# Altium PCB fill.PcbDoc
Units mm, origin at the board's own origin, x right, y up, seen from the top; angles counter-clockwise.
Board outline 97.5 x 65 mm, 2 copper layers (Top Layer, Bottom Layer); 19 components, 54 nets, 267 pads, 80 vias.
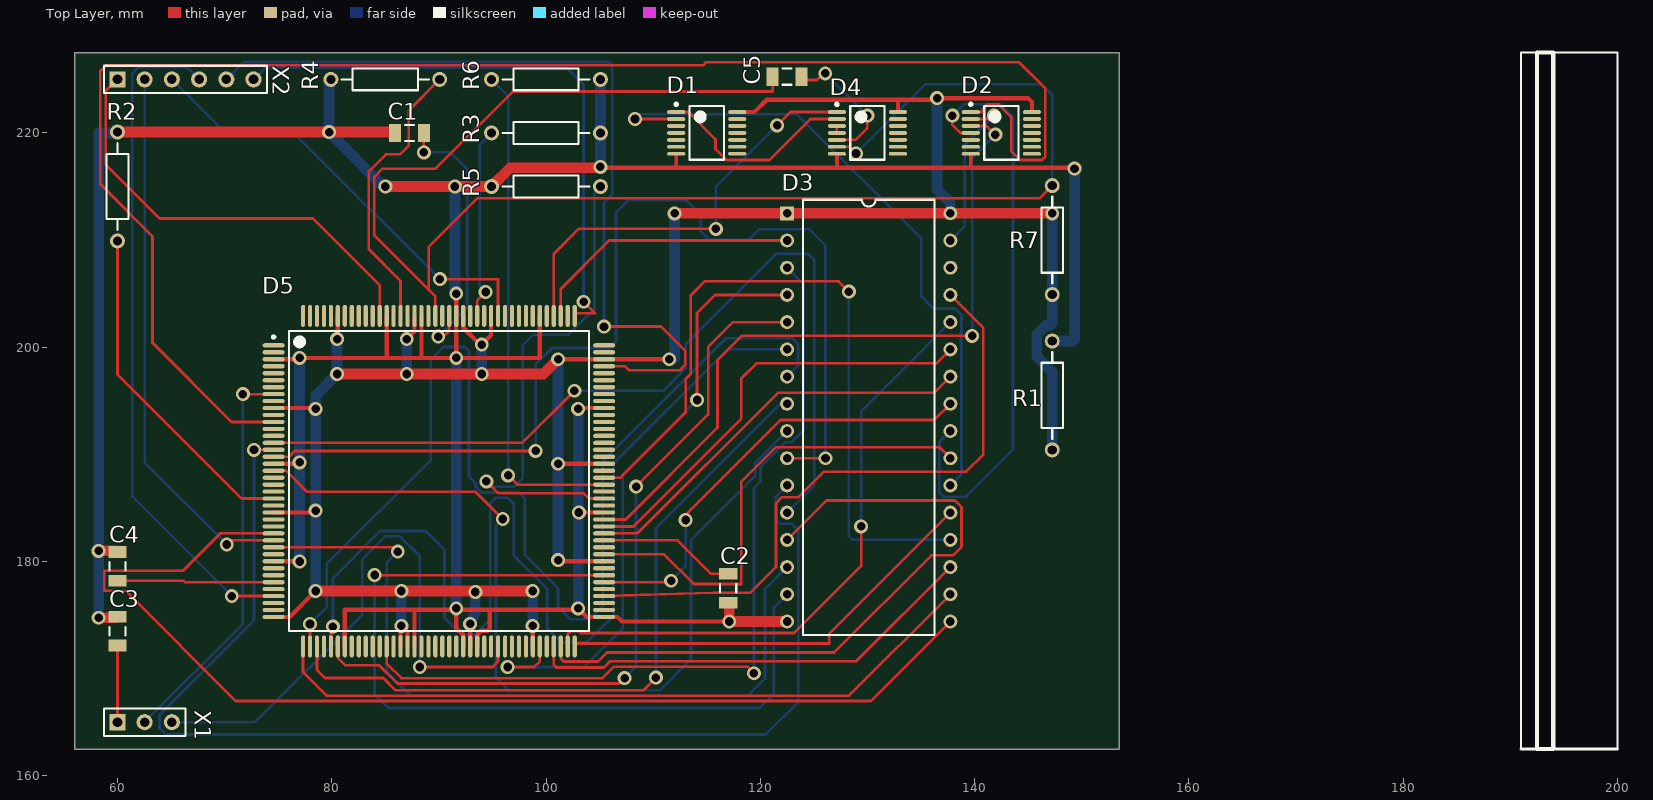
[diagram p0: Top Layer view]
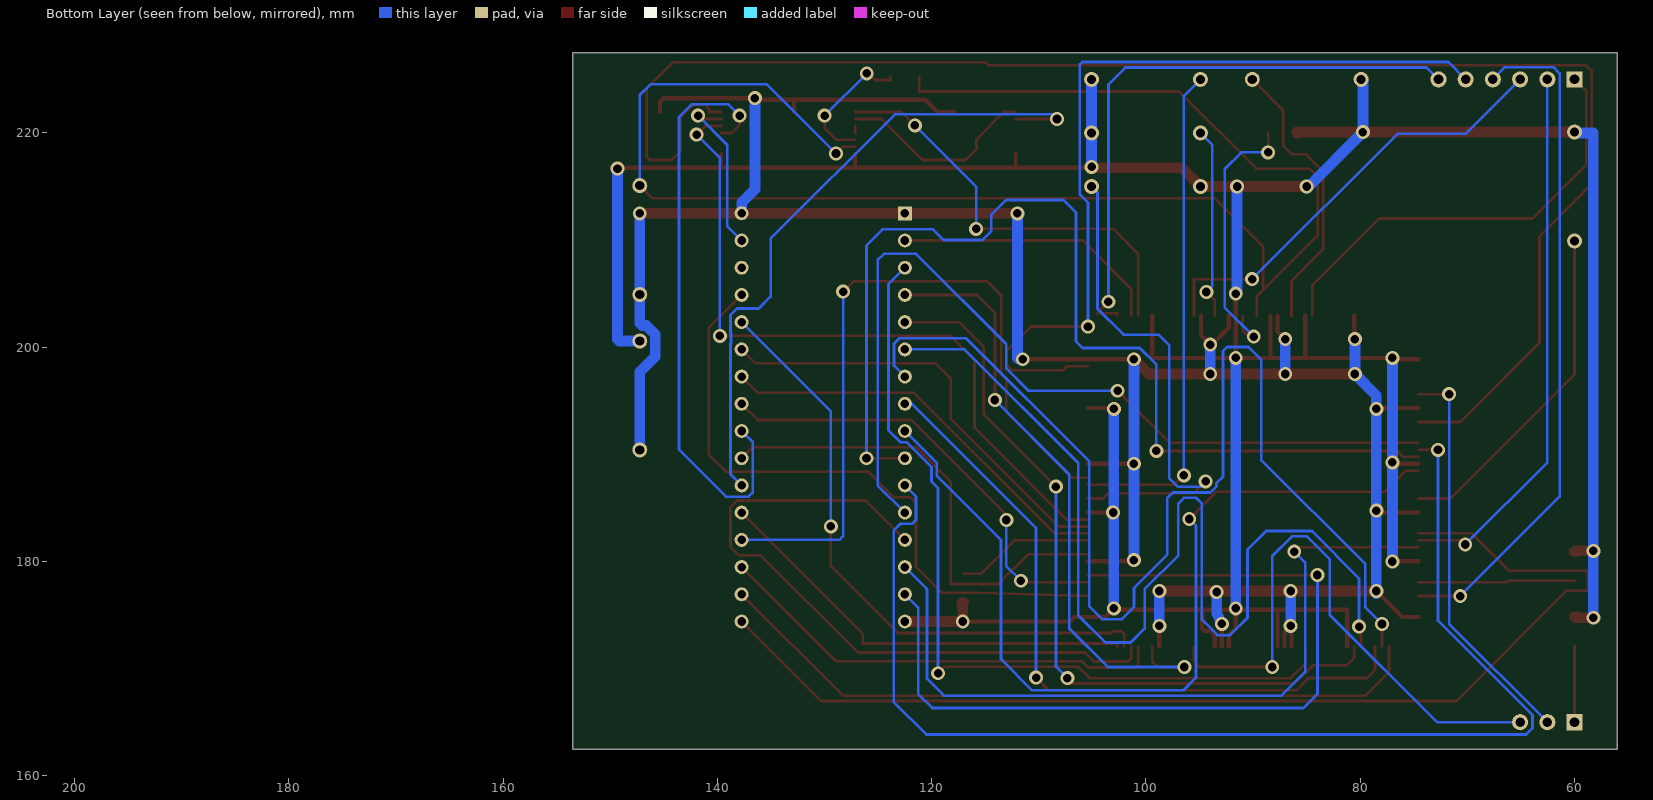
[diagram p1: Bottom Layer view, seen from below]

## Layer stack, top to bottom
Top Layer: signal copper 0.0356
Dielectric: dielectric 0.32, FR-4, Dk 4.8
Bottom Layer: signal copper 0.0356

## Board outline
56,227.5 153.5,227.5 153.5,162.5 56,162.5

## Design rules (kind name [scope] priority, off if disabled: settings)
AssemblyTestPointUsage [All] p0: scope1count=1 scope1_0_kind=Board scope1_0_value=Board scope2count=1 scope2_0_kind=Board scope2_0_value=Board commentlength=0
AssemblyTestpoint [All] p0: scope1count=1 scope1_0_kind=Board scope1_0_value=Board scope2count=1 scope2_0_kind=Board scope2_0_value=Board commentlength=0
Clearance [All] p0: scope1count=1 scope1_0_kind=Board scope1_0_value=Board scope2count=1 scope2_0_kind=Board scope2_0_value=Board commentlength=0 gap=0.25
Clearance [All] p1: gap=0.25
ComponentClearance [All] p0: scope1count=1 scope1_0_kind=Board scope1_0_value=Board scope2count=1 scope2_0_kind=Board scope2_0_value=Board commentlength=0 gap=1 collisioncheckmode=3
ComponentClearance [All] p1: gap=1 collisioncheckmode=3 verticalgap=2540 showdistances=FALSE
DiffPairsRouting [All] p0: scope1count=1 scope1_0_kind=Board scope1_0_value=Board scope2count=1 scope2_0_kind=Board scope2_0_value=Board commentlength=0
FabricationTestPointUsage TestPointUsage [All] p0: scope1count=1 scope1_0_kind=Board scope1_0_value=Board scope2count=1 scope2_0_kind=Board scope2_0_value=Board commentlength=0 valid=0 allowmultiple=FALSE
FabricationTestPointUsage TestPointUsage [All] p1: valid=0 allowmultiple=FALSE
FabricationTestpoint Testpoint [All] p0: scope1count=1 scope1_0_kind=Board scope1_0_value=Board scope2count=1 scope2_0_kind=Board scope2_0_value=Board commentlength=0 side=3 testpointundercomponent=TRUE minsize=1.016 maxsize=2.54 preferedsize=1.524 minholesize=0 maxholesize=1.016 preferedholesize=0.813 testpointgrid=0.025
FabricationTestpoint Testpoint [All] p1: side=3 testpointundercomponent=TRUE minsize=1.016 maxsize=2.54 preferedsize=1.524 minholesize=0 maxholesize=1.016 preferedholesize=0.813 testpointgrid=0.025 allowsidetop=TRUE allowsidebottom=TRUE usegrid=TRUE gridtolerance=0
FanoutControl Fanout_Default [All] p0: scope1count=1 scope1_0_kind=Board scope1_0_value=Board scope2count=1 scope2_0_kind=Board scope2_0_value=Board commentlength=30 // Fanout_Default (Default Rule)
FanoutControl Fanout_Small [All] p0 off: scope1count=1 scope1_0_kind=Board scope1_0_value=Board scope2count=1 scope2_0_kind=Board scope2_0_value=Board commentlength=84 // Protel DXP Scope 1 Expression Was: (CompPinCount < 5)   Fanout_Small (Default Rule)
FanoutControl Fanout_SOIC [All] p0 off: scope1count=1 scope1_0_kind=Board scope1_0_value=Board scope2count=1 scope2_0_kind=Board scope2_0_value=Board commentlength=71 // Protel DXP Scope 1 Expression Was: IsSOIC   Fanout_SOIC (Default Rule)
FanoutControl Fanout_LCC [All] p0 off: scope1count=1 scope1_0_kind=Board scope1_0_value=Board scope2count=1 scope2_0_kind=Board scope2_0_value=Board commentlength=69 // Protel DXP Scope 1 Expression Was: IsLCC   Fanout_LCC (Default Rule)
FanoutControl Fanout_BGA [All] p0 off: scope1count=1 scope1_0_kind=Board scope1_0_value=Board scope2count=1 scope2_0_kind=Board scope2_0_value=Board commentlength=69 // Protel DXP Scope 1 Expression Was: IsBGA   Fanout_BGA (Default Rule)
Height [All] p0: scope1count=1 scope1_0_kind=Board scope1_0_value=Board scope2count=1 scope2_0_kind=Board scope2_0_value=Board commentlength=0
HoleSize [All] p0: scope1count=1 scope1_0_kind=Board scope1_0_value=Board scope2count=1 scope2_0_kind=Board scope2_0_value=Board commentlength=0 absolutevalues=TRUE maxlimit=2.54 minlimit=0.025 maxpercent=80.000 minpercent=20.000
HoleToHoleClearance [All] p0: scope1count=1 scope1_0_kind=Board scope1_0_value=Board scope2count=1 scope2_0_kind=Board scope2_0_value=Board commentlength=0
LayerPairs [All] p0: scope1count=1 scope1_0_kind=Board scope1_0_value=Board scope2count=1 scope2_0_kind=Board scope2_0_value=Board commentlength=0 enforce=TRUE
MinimumSolderMaskSliver [All] p0: scope1count=1 scope1_0_kind=Board scope1_0_value=Board scope2count=1 scope2_0_kind=Board scope2_0_value=Board commentlength=0
MinimumSolderMaskSliver [All] p1: minsoldermaskwidth=0.04
NetAntennae [All] p0: scope1count=1 scope1_0_kind=Board scope1_0_value=Board scope2count=1 scope2_0_kind=Board scope2_0_value=Board commentlength=0
PasteMaskExpansion [All] p0: scope1count=1 scope1_0_kind=Board scope1_0_value=Board scope2count=1 scope2_0_kind=Board scope2_0_value=Board commentlength=0 expansion=0
PlaneClearance [All] p0: scope1count=1 scope1_0_kind=Board scope1_0_value=Board scope2count=1 scope2_0_kind=Board scope2_0_value=Board commentlength=0 clearance=0.508
PlaneConnect [All] p0: scope1count=1 scope1_0_kind=Board scope1_0_value=Board scope2count=1 scope2_0_kind=Board scope2_0_value=Board commentlength=0 planeconnectstyle=Relief reliefexpansion=0.508 reliefentries=4 reliefconductorwidth=0.254 reliefairgap=0.254
PolygonConnect [All] p0: scope1count=1 scope1_0_kind=Board scope1_0_value=Board scope2count=1 scope2_0_kind=Board scope2_0_value=Board commentlength=0 connectstyle=Direct reliefconductorwidth=0.254 reliefentries=4 polygonreliefangle="90 Angle"
PolygonConnect [All] p1: connectstyle=Direct reliefconductorwidth=0.254 reliefentries=4 polygonreliefangle="90 Angle"
RoutingCorners [All] p0: scope1count=1 scope1_0_kind=Board scope1_0_value=Board scope2count=1 scope2_0_kind=Board scope2_0_value=Board commentlength=0 cornerstyle=45-Degree minsetback=2.54 maxsetback=2.54
RoutingLayers [All] p0: scope1count=1 scope1_0_kind=Board scope1_0_value=Board scope2count=1 scope2_0_kind=Board scope2_0_value=Board commentlength=0 top layer=Horizontal bottom layer=Vertical
RoutingPriority [All] p0: scope1count=1 scope1_0_kind=Board scope1_0_value=Board scope2count=1 scope2_0_kind=Board scope2_0_value=Board commentlength=0
RoutingTopology [All] p0: scope1count=1 scope1_0_kind=Board scope1_0_value=Board scope2count=1 scope2_0_kind=Board scope2_0_value=Board commentlength=0 topology=Shortest
RoutingVias [All] p0: scope1count=1 scope1_0_kind=Board scope1_0_value=Board scope2count=1 scope2_0_kind=Board scope2_0_value=Board commentlength=0 holewidth=0.8 width=1.3 viastyle="Through Hole" minholewidth=0.8 minwidth=1.3 maxholewidth=0.8 maxwidth=1.3
RoutingVias [All] p1: holewidth=0.8 width=1.3 viastyle="Through Hole" minholewidth=0.8 minwidth=1.3 maxholewidth=0.8 maxwidth=1.3
SMDNeckDown [All] p0: scope1count=1 scope1_0_kind=Board scope1_0_value=Board scope2count=1 scope2_0_kind=Board scope2_0_value=Board commentlength=0 percent=100.000
SMDNeckDown [All] p1: percent=100.000
ShortCircuit [All] p0: scope1count=1 scope1_0_kind=Board scope1_0_value=Board scope2count=1 scope2_0_kind=Board scope2_0_value=Board commentlength=0 allowed=FALSE
SilkToSilkClearance [All] p0: scope1count=1 scope1_0_kind=Board scope1_0_value=Board scope2count=1 scope2_0_kind=Board scope2_0_value=Board commentlength=0
SilkToSilkClearance [All] p1: silktosilkclearance=0.15
SilkscreenOverComponentPads [All] p0: scope1count=1 scope1_0_kind=Board scope1_0_value=Board scope2count=1 scope2_0_kind=Board scope2_0_value=Board commentlength=0
SilkscreenOverComponentPads [All] p1: minsilkscreentomaskgap=0.15
SolderMaskExpansion [All] p0: scope1count=1 scope1_0_kind=Board scope1_0_value=Board scope2count=1 scope2_0_kind=Board scope2_0_value=Board commentlength=0 expansion=0.102
SolderMaskExpansion [All] p1: expansion=0.102
UnRoutedNet [All] p0: scope1count=1 scope1_0_kind=Board scope1_0_value=Board scope2count=1 scope2_0_kind=Board scope2_0_value=Board commentlength=0
Width [All] p0: scope1count=1 scope1_0_kind=Board scope1_0_value=Board scope2count=1 scope2_0_kind=Board scope2_0_value=Board commentlength=0 maxlimit=0.25 minlimit=0.25 preferedwidth=0.25
Width Width_Power [All] p0: scope1count=1 scope1_0_kind=NetClass scope1_0_value=Power scope2count=1 scope2_0_kind=Board scope2_0_value=Board commentlength=0 maxlimit=1 minlimit=0.25 preferedwidth=1
Width Width_Power [InNetClass('Power')] p1: maxlimit=1 minlimit=0.25 preferedwidth=1
Width [All] p2: maxlimit=0.25 minlimit=0.25 preferedwidth=0.25
22 further rules are at their usual default settings.

## Classes and differential pairs
net class Power: GND VCC+

## Components (designator, comment, footprint, x,y, rotation, side; value= is the part's Value field where it differs from the comment)
C1 "Cap Semi" C1206 87.25,220 r180 top
C2 "Cap Semi" C1206 117,177.5 r270 top
C3 "Cap Semi" C1206 60,173.5 r90 top
C4 "Cap Semi" C1206 60,179.55 r90 top
C5 "Cap Semi" C1206 122.5,225.25 r180 top
D1 "ЭКФ1553ЛН1" SO14 115,220 r0 top
D2 "ЭКФ1533ЛП16" SO14 142.5,220 r0 top
D3 "AT49F001" SCL32 122.5,212.5 r0 top
D4 "ЭКФ1533ЛА3" SO14 130,220 r0 top
D5 "EPM7192SQC160" PQFP160 90,187.5 r0 top
R1 "Res2" AXIAL-0.4 147.25,195.5 r90 top
R2 "Res2" AXIAL-0.4 60,215 r90 top
R3 "Res2" AXIAL-0.4 100,220 r0 top
R4 "Res2" AXIAL-0.4 85,225 r180 top
R5 "Res2" AXIAL-0.4 100,215 r180 top
R6 "Res2" AXIAL-0.4 100,225 r180 top
R7 "Res2" AXIAL-0.4 147.25,210 r90 top
X1 "Header 3" HDR1X3 60,165 r0 top
X2 "Header 6" HDR1X6 60,225 r0 top

## Footprints (in the part's own frame and the unit in brackets; to place one, negate y for a bottom-side part, rotate by r counter-clockwise, add the part's x,y. Pads: shape width x height; smd on the part's side, far side on the other; paste and mask are expansions set on the pad)
AXIAL-0.4 [mm] "Axial Device, Thru-Hole; 2 Leads; 0.4 in Pin Spacing"
  round 1.4 hole 0.85: 1(-5.08,0) 2(5.08,0)
  silkscreen extent -4.06,-1.02 4.06,1.02
C1206 [mm] "Chip Capacitor, Body 3.2x1.6mm, IPC High Density"
  rect 1.1x1.7 smd: 1(-1.35,0) 2(1.35,0)
  silkscreen extent -0.4,-0.75 0.4,0.75
HDR1X3 [mm] "Connector; Header; 3 Position"
  rect 1.5x1.5 hole 0.9: 1(0,0)
  round 1.5 hole 0.9: 2(2.54,0) 3(5.08,0)
  silkscreen extent -1.27,-1.27 6.35,1.27
HDR1X6 [mm] "Connector; Header; 6 Position"
  rect 1.5x1.5 hole 0.9: 1(0,0)
  round 1.5 hole 0.9: 2(2.54,0) 3(5.08,0) 4(7.62,0) 5(10.16,0) 6(12.7,0)
  silkscreen extent -1.27,-1.27 13.97,1.27
PQFP160 [mm] "QFP, 160-Leads, Body 32,2x32,2mm (max), Pitch 0,65mm, IPC Medium Density"
  oval 2.05x0.4 smd: 1(-15.425,12.675) 2(-15.425,12.025) 3(-15.425,11.375) 4(-15.425,10.725) 5(-15.425,10.075) 6(-15.425,9.425) 7(-15.425,8.775) 8(-15.425,8.125) 9(-15.425,7.475) 10(-15.425,6.825) 11(-15.425,6.175) 12(-15.425,5.525) 13(-15.425,4.875) 14(-15.425,4.225) 15(-15.425,3.575) 16(-15.425,2.925) 17(-15.425,2.275) 18(-15.425,1.625) 19(-15.425,0.975) 20(-15.425,0.325) 21(-15.425,-0.325) 22(-15.425,-0.975) 23(-15.425,-1.625) 24(-15.425,-2.275) 25(-15.425,-2.925) 26(-15.425,-3.575) 27(-15.425,-4.225) 28(-15.425,-4.875) 29(-15.425,-5.525) 30(-15.425,-6.175) 31(-15.425,-6.825) 32(-15.425,-7.475) 33(-15.425,-8.125) 34(-15.425,-8.775) 35(-15.425,-9.425) 36(-15.425,-10.075) 37(-15.425,-10.725) 38(-15.425,-11.375) 39(-15.425,-12.025) 40(-15.425,-12.675) 81(15.425,-12.675) 82(15.425,-12.025) 83(15.425,-11.375) 84(15.425,-10.725) 85(15.425,-10.075) 86(15.425,-9.425) 87(15.425,-8.775) 88(15.425,-8.125) 89(15.425,-7.475) 90(15.425,-6.825) 91(15.425,-6.175) 92(15.425,-5.525) 93(15.425,-4.875) 94(15.425,-4.225) 95(15.425,-3.575) 96(15.425,-2.925) 97(15.425,-2.275) 98(15.425,-1.625) 99(15.425,-0.975) 100(15.425,-0.325) 101(15.425,0.325) 102(15.425,0.975) 103(15.425,1.625) 104(15.425,2.275) 105(15.425,2.925) 106(15.425,3.575) 107(15.425,4.225) 108(15.425,4.875) 109(15.425,5.525) 110(15.425,6.175) 111(15.425,6.825) 112(15.425,7.475) 113(15.425,8.125) 114(15.425,8.775) 115(15.425,9.425) 116(15.425,10.075) 117(15.425,10.725) 118(15.425,11.375) 119(15.425,12.025) 120(15.425,12.675)
  oval 0.4x2.05 smd: 41(-12.675,-15.425) 42(-12.025,-15.425) 43(-11.375,-15.425) 44(-10.725,-15.425) 45(-10.075,-15.425) 46(-9.425,-15.425) 47(-8.775,-15.425) 48(-8.125,-15.425) 49(-7.475,-15.425) 50(-6.825,-15.425) 51(-6.175,-15.425) 52(-5.525,-15.425) 53(-4.875,-15.425) 54(-4.225,-15.425) 55(-3.575,-15.425) 56(-2.925,-15.425) 57(-2.275,-15.425) 58(-1.625,-15.425) 59(-0.975,-15.425) 60(-0.325,-15.425) 61(0.325,-15.425) 62(0.975,-15.425) 63(1.625,-15.425) 64(2.275,-15.425) 65(2.925,-15.425) 66(3.575,-15.425) 67(4.225,-15.425) 68(4.875,-15.425) 69(5.525,-15.425) 70(6.175,-15.425) 71(6.825,-15.425) 72(7.475,-15.425) 73(8.125,-15.425) 74(8.775,-15.425) 75(9.425,-15.425) 76(10.075,-15.425) 77(10.725,-15.425) 78(11.375,-15.425) 79(12.025,-15.425) 80(12.675,-15.425) 121(12.675,15.425) 122(12.025,15.425) 123(11.375,15.425) 124(10.725,15.425) 125(10.075,15.425) 126(9.425,15.425) 127(8.775,15.425) 128(8.125,15.425) 129(7.475,15.425) 130(6.825,15.425) 131(6.175,15.425) 132(5.525,15.425) 133(4.875,15.425) 134(4.225,15.425) 135(3.575,15.425) 136(2.925,15.425) 137(2.275,15.425) 138(1.625,15.425) 139(0.975,15.425) 140(0.325,15.425) 141(-0.325,15.425) 142(-0.975,15.425) 143(-1.625,15.425) 144(-2.275,15.425) 145(-2.925,15.425) 146(-3.575,15.425) 147(-4.225,15.425) 148(-4.875,15.425) 149(-5.525,15.425) 150(-6.175,15.425) 151(-6.825,15.425) 152(-7.475,15.425) 153(-8.125,15.425) 154(-8.775,15.425) 155(-9.425,15.425) 156(-10.075,15.425) 157(-10.725,15.425) 158(-11.375,15.425) 159(-12.025,15.425) 160(-12.675,15.425)
  silkscreen extent -15.55,-14 14,14
SCL32 [mm]
  rect 1.3x1.3 hole 0.8: 1(0,0)
  round 1.3 hole 0.8: 2(0,-2.54) 3(0,-5.08) 4(0,-7.62) 5(0,-10.16) 6(0,-12.7) 7(0,-15.24) 8(0,-17.78) 9(0,-20.32) 10(0,-22.86) 11(0,-25.4) 12(0,-27.94) 13(0,-30.48) 14(0,-33.02) 15(0,-35.56) 16(0,-38.1) 17(15.24,-38.1) 18(15.24,-35.56) 19(15.24,-33.02) 20(15.24,-30.48) 21(15.24,-27.94) 22(15.24,-25.4) 23(15.24,-22.86) 24(15.24,-20.32) 25(15.24,-17.78) 26(15.24,-15.24) 27(15.24,-12.7) 28(15.24,-10.16) 29(15.24,-7.62) 30(15.24,-5.08) 31(15.24,-2.54) 32(15.24,0)
  silkscreen extent 1.49,-39.37 13.75,1.27
SO14 [mm] "TSOP, 14-Leads, Body 5,0x4,4mm (max), Pitch 0,65mm, IPC Medium Density"
  oval 1.7x0.35 smd: 1(-2.85,1.95) 2(-2.85,1.3) 3(-2.85,0.65) 4(-2.85,0) 5(-2.85,-0.65) 6(-2.85,-1.3) 7(-2.85,-1.95) 8(2.85,-1.95) 9(2.85,-1.3) 10(2.85,-0.65) 11(2.85,0) 12(2.85,0.65) 13(2.85,1.3) 14(2.85,1.95)
  silkscreen extent -2.97,-2.5 1.6,2.8

## Part data
C1 C2 C3 C4 C5: "Capacitor (Semiconductor SIM Model)"
D1: "6 НЕ"
D2: "6 повторителей"
D3: "EEPROM"
D4: "4 2И-НЕ"
D5: "SWITCH"
R1 R2 R3 R4 R5 R6 R7: "Resistor"
X1: "Header, 3-Pin"
X2: "Header, 6-Pin"

## Via types
v1: diameter 1.3, hole 0.8, Top Layer to Bottom Layer, 80 vias

## Nets (pads, with @x,y where several pads share a name; then routed paths per layer and width w, separated by ;. In a path a pad name is that pad's centre, name@x,y a point inside that pad or via, vN(x,y) a via of type N, cw(c..) or ccw(c..) an arc to the next point about the centre after c; other vN are vias at no path point)
3K: C3.1 X1.1 | length 7.1
  Top Layer w0.25: X1.1 C3.1
4K: D5.117 X2.5 | length 79.3
  Top Layer w0.25: v1(105.41,201.93) 110.724,201.93 113.01,199.644 113.01,198.374 112.486,197.85 107.737,197.85 107.362,198.225 D5.117
  Bottom Layer w0.25: X2.5 71.779,226.619 105.943,226.619 106.172,226.39 106.172,214.249 105.41,213.487 v1(105.41,201.93)
13: C4.1 D5.35 | length 14.6
  Top Layer w0.25: C4.1 66.169,178.2 66.294,178.075 D5.35
14: D3.20 D5.101 | length 69.4
  Top Layer w0.25: D5.101 106.959,187.825 113.03,193.896 113.03,197.01 113.51,197.49 113.51,204.848 114.808,206.146 127.305,206.146 v1(128.27,205.181)
  Bottom Layer w0.25: v1(128.27,205.181) 128.27,182.372 128.622,182.02 D3.20
92K: D2.1 D5.12 | length 149.2
  Top Layer w0.25: D5.12 70.663,193.025 63.271,200.416 63.271,210.337 58.395,215.214 58.395,225.781 58.928,226.314 114.656,226.314 114.935,226.593 144.17,226.593 146.583,224.18 146.583,217.754 146.304,217.475 144.272,217.475 143.414,218.333 143.414,221.488 142.252,222.65 141.173,222.65 140.773,222.25 140.773,221.95 D2.1
105: D3.11 D5.16 | length 114.7
  Top Layer w0.25: v1(72.746,190.425) D5.16
  Bottom Layer w0.25: v1(72.746,190.425) 72.746,174.473 63.932,165.659 63.932,164.44 64.516,163.855 120.498,163.855 123.546,166.903 123.546,182.905 122.936,183.515 121.844,183.515 121.463,183.896 121.463,186.063 D3.11
110K: D5.23 R2.1 | length 31.8
  Top Layer w0.25: R2.1 60,197.452 71.577,185.875 D5.23
111K: D5.135 R3.1 | length 18.1
  Top Layer w0.25: D5.135 93.575,204.37 v1(94.361,205.156)
  Bottom Layer w0.25: v1(94.361,205.156) 93.828,205.689 93.828,218.908 R3.1
112K: D5.146 R4.1 | length 26.8
  Top Layer w0.25: D5.146 86.425,206.183 83.464,209.144 83.464,216.408 85.065,218.008 86.36,218.008 87.198,218.846 87.198,222.118 R4.1
113K: D5.98 R5.1 | length 47.7
  Top Layer w0.25: v1(94.437,187.477) 95.529,186.385 103.503,186.385 104.013,185.875 D5.98
  Bottom Layer w0.25: v1(94.437,187.477) 94.945,186.969 97.028,186.969 97.815,187.757 97.815,200.152 98.831,201.168 102.108,201.168 104.53,203.59 104.53,214.45 R5.1
123K: D3.5 D5.46 | length 71.5
  Top Layer w0.25: D5.46 80.575,171.012 81.28,170.307 84.438,170.307 86.131,168.613 106.84,168.613 v1(107.34,169.113) ; v1(108.407,186.995) 115.138,193.726 115.138,200.025 117.453,202.34 D3.5
  Bottom Layer w0.25: v1(107.34,169.113) 108.407,170.18 v1(108.407,186.995)
124: D5.69 X1.3 | length 53.4
  Top Layer w0.25: v1(88.214,170.155) 95.017,170.155 95.525,170.663 D5.69
  Bottom Layer w0.25: X1.3 72.823,165 82.855,175.031 82.855,180.213 84.988,182.347 86.36,182.347 88.214,180.492 v1(88.214,170.155)
124K: C1.1 D5.139 | length 25.9
  Top Layer w0.25: v1(88.6,218.186) C1.1 ; v1(89.941,200.99) 90.442,200.99 90.975,201.524 D5.139
  Bottom Layer w0.25: v1(88.6,218.186) 91.084,218.186 92.659,216.611 92.659,203.708 v1(89.941,200.99)
125: C2.1 D5.92 | length 12.9
  Top Layer w0.25: D5.92 112.293,181.975 115.418,178.85 C2.1
125K: D3.6 D5.45 | length 100.3
  Top Layer w0.25: D5.45 79.925,173.727 v1(80.112,173.914)
  Bottom Layer w0.25: v1(80.112,173.914) 80.112,178.435 84.527,182.85 88.778,182.85 90.526,181.102 90.526,174.752 92.151,173.126 93.345,173.126 94.793,174.574 94.793,185.42 95.31,185.937 96.469,185.937 96.986,185.42 96.986,180.56 100.127,177.419 100.127,173.736 101.422,172.441 103.784,172.441 106.324,174.981 106.324,189.205 116.92,199.8 D3.6
126K: D3.7 D5.42 | length 110.4
  Top Layer w0.25: D5.42 v1(77.975,174.165)
  Bottom Layer w0.25: v1(77.975,174.165) 79.527,175.717 79.527,179.756 89.256,189.484 89.256,198.857 90.424,200.025 92.431,200.025 92.812,199.644 92.812,187.909 93.415,187.306 93.415,187.002 93.98,186.437 97.486,186.437 98.019,185.905 98.019,180.619 101.117,177.521 101.117,175.768 102.286,174.6 104.064,174.6 105.283,175.819 105.283,189.332 116.789,200.838 123.012,200.838 123.525,200.325 123.525,198.285 D3.7
128K: D3.8 D5.43 | length 66.1
  Top Layer w0.25: D5.43 78.625,169.875 79.374,169.127 84.808,169.127 85.956,167.979 109.076,167.979 v1(110.261,169.164)
  Bottom Layer w0.25: v1(110.261,169.164) 110.261,183.141 121.84,194.72 D3.8
130K: D3.9 D5.19 | length 83.2
  Top Layer w0.25: D5.19 75.736,188.475 77.699,186.512 93.415,186.512 v1(95.961,183.966)
  Bottom Layer w0.25: v1(95.961,183.966) 95.339,183.343 95.339,169.164 96.524,167.979 110.626,167.979 113.538,170.891 113.538,181.996 119.521,187.979 119.521,189.201 D3.9
136K: D3.10 D5.17 | length 100.1
  Top Layer w0.25: D5.17 75.997,189.775 76.544,190.322 v1(99.035,190.322) ; D3.10 v1(126.086,189.64)
  Bottom Layer w0.25: v1(99.035,190.322) 99.035,198.374 100.584,199.923 105.918,199.923 106.528,200.533 106.528,212.573 107.696,213.741 113.055,213.741 114.452,212.344 114.452,210.82 115.265,210.007 118.897,210.007 119.888,210.998 124.587,210.998 126.086,209.499 v1(126.086,189.64)
140K: D5.37 X2.4 | length 63.5
  Top Layer w0.25: v1(70.672,176.775) D5.37
  Bottom Layer w0.25: X2.4 66.484,226.136 61.976,226.136 61.392,225.552 61.392,186.055 v1(70.672,176.775)
141K: D5.29 X2.2 | length 51.1
  Top Layer w0.25: v1(70.206,181.585) 70.596,181.975 D5.29
  Bottom Layer w0.25: X2.2 62.54,189.25 v1(70.206,181.585)
142K: D3.2 D5.123 | length 25.5
  Top Layer w0.25: D5.123 101.375,205.435 105.9,209.96 D3.2
145K: D2.2 D3.31 | length 15.6
  Top Layer w0.25: D2.2 141.493,221.3 v1(141.808,221.615)
  Bottom Layer w0.25: D3.31 139.09,211.31 139.09,218.897 v1(141.808,221.615)
146K: D2.4 D3.24 | length 55.6
  Top Layer w0.25: v1(137.922,221.615) 137.922,220.762 138.684,220 D2.4
  Bottom Layer w0.25: D3.24 136.703,191.143 136.703,186.436 137.084,186.055 139.192,186.055 143.595,190.458 143.595,221.488 142.392,222.691 138.998,222.691 v1(137.922,221.615)
151K: D3.14 D5.30 | length 71.6
  Top Layer w0.25: D5.30 85.76,181.325 v1(86.162,180.923)
  Bottom Layer w0.25: v1(86.162,180.923) 85.146,179.907 85.146,169.672 87.34,167.479 118.863,167.479 120.447,169.062 120.447,177.427 D3.14
153K: D3.17 D5.28 | length 105.4
  Top Layer w0.25: D5.28 69.596,182.625 66.096,179.125 58.775,179.125 58.775,177.275 60.731,177.275 71.028,166.979 130.319,166.979 D3.17
154K: D3.18 D5.41 | length 67.6
  Top Layer w0.25: D5.41 77.325,169.672 79.518,167.479 128.279,167.479 D3.18
157K: D3.21 D5.80 | length 40.9
  Top Layer w0.25: D5.80 102.675,172.339 126.441,172.339 126.441,173.261 D3.21
158K: D5.8 X1.2 | length 37.3
  Top Layer w0.25: v1(71.704,195.625) D5.8
  Bottom Layer w0.25: X1.2 71.704,174.164 v1(71.704,195.625)
166K: D4.1 D5.124 | length 40
  Top Layer w0.25: D5.124 100.725,208.726 103.048,211.049 v1(115.849,211.049) ; v1(121.564,220.701) 122.814,221.95 D4.1
  Bottom Layer w0.25: v1(115.849,211.049) 115.849,214.986 v1(121.564,220.701)
167K: D1.2 D3.22 | length 61.8
  Top Layer w0.25: v1(108.306,221.3) D1.2
  Bottom Layer w0.25: v1(108.306,221.3) 108.748,221.742 123.444,221.742 135.026,210.16 135.026,204.724 136.144,203.606 138.176,203.606 138.786,202.997 138.786,201.346 138.735,201.295 138.735,200.381 138.786,200.33 138.786,188.146 D3.22
169K: D5.121 X2.6 | length 55.9
  Top Layer w0.25: D5.121 102.675,203.175 104.572,203.175 v1(103.505,204.241)
  Bottom Layer w0.25: X2.6 73.811,226.111 101.93,226.111 103.505,224.536 v1(103.505,204.241)
204: D3.12 D5.15 | length 84
  Top Layer w0.25: D5.15 97.781,191.075 v1(102.641,195.936)
  Bottom Layer w0.25: v1(102.641,195.936) 110.973,195.936 113.03,197.993 113.03,200.279 121.463,208.712 124.46,208.712 125.044,208.128 125.044,187.104 D3.12
238: D5.149 X2.1 | length 41.5
  Top Layer w0.25: X2.1 58.903,223.903 58.903,217.043 63.932,212.014 78.252,212.014 84.475,205.791 D5.149
239: D5.132 X2.3 | length 41.6
  Top Layer w0.25: v1(90.094,206.35) 95.525,206.35 D5.132
  Bottom Layer w0.25: X2.3 70.167,219.913 76.53,219.913 v1(90.094,206.35)
352: C5.2 D4.6 D5.141 R7.2 | length 153.7
  Top Layer w0.25: D5.141 89.675,204.718 89.069,205.325 ; C5.2 121.15,223.876 96.901,223.876 89.687,216.662 84.734,216.662 83.972,215.9 83.972,210.421 89.069,205.325 ; D4.6 128.315,218.7 v1(128.93,218.084) ; R7.2 146.089,213.919 93.599,213.919 89.069,209.389 89.069,205.325
  Bottom Layer w0.25: v1(128.93,218.084) 135.382,224.536 146.234,224.536 147.25,223.52 R7.2
400K: D2.3 D5.95 | length 67.4
  Top Layer w0.25: D5.95 107.444,183.925 116.011,192.492 116.011,198.815 118.262,201.066 v1(139.776,201.066) ; D2.3 141.12,220.65 v1(141.934,219.836)
  Bottom Layer w0.25: v1(139.776,201.066) 139.776,217.678 v1(141.934,219.836)
401K: D3.27 D5.94 | length 41.4
  Top Layer w0.25: D5.94 108.147,183.275 118.237,193.365 118.237,197.104 119.634,198.501 136.441,198.501 D3.27
402K: D3.26 D5.93 | length 38.4
  Top Layer w0.25: D5.93 108.516,182.625 121.636,195.745 136.225,195.745 D3.26
403K: D3.23 D5.90 | length 44.8
  Top Layer w0.25: D5.90 111.019,180.675 113.792,177.902 118.237,177.902 118.237,187.452 121.463,190.678 136.702,190.678 D3.23
404K: D3.25 D5.86 | length 42
  Top Layer w0.25: D5.86 111.552,178.075 v1(111.684,178.206) ; v1(113.03,183.871) 113.03,184.341 121.894,193.205 136.225,193.205 D3.25
  Bottom Layer w0.25: v1(111.684,178.206) 113.03,179.553 v1(113.03,183.871)
405K: D3.4 D5.75 | length 58.3
  Top Layer w0.25: v1(96.418,170.155) 98.892,170.155 99.425,170.688 D5.75 ; v1(114.097,195.072) 114.097,203.2 115.777,204.88 D3.4
  Bottom Layer w0.25: v1(96.418,170.155) 103.556,170.155 107.163,173.761 107.163,188.138 v1(114.097,195.072)
406K: D3.28 D5.79 | length 57.5
  Top Layer w0.25: D5.79 102.025,173.228 102.279,173.482 103.099,173.482 103.251,173.33 123.165,173.33 129.413,179.578 v1(129.413,183.286)
  Bottom Layer w0.25: v1(129.413,183.286) 129.413,194.013 D3.28
407K: D3.29 D5.84 | length 60.4
  Top Layer w0.25: D5.84 115.595,177.089 119.075,177.089 121.463,179.476 121.463,185.42 122.047,186.004 123.546,186.004 125.933,188.392 139.217,188.392 140.818,189.992 140.818,201.802 D3.29
408K: D3.3 D5.53 | length 77.9
  Top Layer w0.25: D5.53 85.125,170.5 86.512,169.113 105.287,169.113 106.363,170.189 118.787,170.189 v1(119.405,169.57)
  Bottom Layer w0.25: v1(119.405,169.57) 119.405,186.864 120.021,187.479 120.021,188.804 122.352,191.135 122.936,191.135 124.025,192.224 124.025,205.895 D3.3
409K: D3.13 D5.78 | length 64.9
  Top Layer w0.25: D5.78 101.375,170.942 101.654,170.663 104.84,170.663 105.678,171.501 126.898,171.501 135.976,180.579 138.008,180.579 138.786,181.356 138.786,185.09 138.176,185.699 126.179,185.699 D3.13
410K: D3.15 D5.87 | length 80.7
  Top Layer w0.25: v1(83.998,178.74) 84.013,178.725 D5.87
  Bottom Layer w0.25: v1(83.998,178.74) 83.998,167.64 85.319,166.319 119.939,166.319 121.26,167.64 121.26,175.7 D3.15
411K: D3.19 D5.77 | length 42.7
  Top Layer w0.25: D5.77 100.725,170.358 100.97,170.113 105.41,170.113 105.986,170.689 128.949,170.689 D3.19
GND: C1.2 C2.2 C3.2 C4.2 D1.7 D2.7 D3.16 D4.7 D5.3 D5.18 D5.32 D5.47 D5.57 D5.64 D5.66 D5.81 D5.96 D5.111 D5.126 D5.138 D5.143 D5.148 R1.2 R2.2 R3.2 R4.2 R5.2 R6.1 | length 365.7
  Top Layer w0.35: 112.15,216.75 D1.7 ; 127.15,216.75 D4.7 ; 139.65,216.75 D2.7
  Top Layer w0.4: D5.32 v1@76.975,180.025 ; D5.18 v1@76.875,189.125 ; D5.3 v1@77,198.875 ; v1@77.25,199 v1(91.625,199) ; D5.47 81.225,175.5 81.25,175.5 91.625,175.5 v1@103,175.5 ; 85.125,199 D5.148 ; D5.57 87.725,175.5 ; 88.375,199 D5.143 ; v1(91.625,175.625) 91.625,173.75 91.825,173.55 91.894,173.55 92.275,173.169 D5.64 ; v1(91.625,205) D5.138 v1(91.625,199) ; D5.66 93.575,172.575 93.575,173.169 93.956,173.55 94.55,173.55 94.75,173.75 94.75,175.5 ; D5.126 99.425,199 v1(91.625,199) ; v1(103,175.625) 103.8,174.825 D5.81 106.675,174.825 107.1,174.4 v1(117.1,174.4) ; v1(103.075,184.575) D5.96 ; v1@103.075,194.325 D5.111 ; v1@105.08,216.75 v1@149.33,216.75
  Top Layer w1: v1(58.25,181) 59.9,181 59.9,180.9 C4.2 ; v1@58.35,174.85 v1(58.25,174.75) 59.9,174.75 59.9,174.85 C3.2 ; R2.2 v1(79.75,220.08) 85.9,220.08 C1.2 ; v1(85,215) v1(91.5,215) R5.2 96.67,216.75 v1@105,216.75 ; C2.2 117.196,176.15 117.196,176.098 117.1,176.05 v1(117.1,174.4) D3.16 ; v1@149.33,216.74 v1@149.499,216.739
  Bottom Layer w1: v1(58.25,174.75) v1(58.25,181) 58.25,220 59.92,220 R2.2 ; v1(77,180) v1(77,189.25) v1(77,199) ; R4.2 79.75,224.83 v1(79.75,220.08) 84.915,214.915 v1@85,214.83 ; v1@91.5,205.125 v1(91.5,215) ; v1(91.625,175.625) v1(91.625,199) ; v1(103,175.625) v1(103,194.25) ; v1(105.08,216.83) R3.2 R6.1 ; R1.2 149.16,200.58 ; 149.33,200.75 v1(149.33,216.67)
NetC5_1: C5.1 D4.5 | length 12.8
  Top Layer w0.25: C5.1 123.85,224.942 125.298,224.942 125.908,225.552 v1(126.06,225.552) ; D4.5 128.875,219.35 129.997,220.472 v1(129.997,221.615)
  Bottom Layer w0.25: v1(126.06,225.552) v1(129.997,221.615)
NetD1_2: D1.1 D4.2 | length 19
  Top Layer w0.25: D1.1 113.279,221.95 115.824,219.405 115.824,218.491 116.84,217.475 120.842,217.475 124.667,221.3 D4.2
NetD4_3: D4.3 D4.4 | length 0.6
  Top Layer w0.25: D4.4 D4.3
NetD5_100: D5.100 R6.2 | length 46.9
  Top Layer w0.25: v1(96.461,188.036) 97.322,187.175 D5.100
  Bottom Layer w0.25: R6.2 96.461,223.459 v1(96.461,188.036)
VCC+: D1.14 D2.14 D3.1 D3.32 D4.14 D5.10 D5.25 D5.40 D5.55 D5.56 D5.65 D5.74 D5.89 D5.103 D5.118 D5.133 D5.137 D5.144 D5.155 R1.1 R7.1 | length 265.6
  Top Layer w0.35: D1.14 119.45,221.95 ; D4.14 132.85,222.95 ; D2.14 145.35,222.9
  Top Layer w0.4: D5.40 76.075,174.825 v1(78.5,177.25) ; D5.25 v1@78.501,184.575 ; D5.10 v1@78.501,194.325 ; v1@80.575,200.825 D5.155 ; D5.55 v1@86.425,173.925 ; v1(86.5,174) 87.075,173.425 D5.56 ; v1(87,200.75) 87.725,201.475 D5.144 ; D5.137 92.275,201.815 93.92,200.17 94.875,201.125 D5.133 ; D5.65 v1(92.925,174.175) ; D5.74 v1@98.775,173.975 ; v1@101.125,180.025 D5.89 ; v1(101.125,189.125) D5.103 ; v1(101.125,198.875) D5.118 v1(111.5,198.875) ; 119.45,221.95 120.6,223.1 133,223.1 ; 132.85,222.95 133,223.1 ; 145.35,222.9 145,223.25 v1(136.5,223.25) 136.35,223.1 133,223.1
  Top Layer w1: v1(78.5,177.25) v1(86.5,177.25) v1(98.75,177.25) ; v1(80.5,197.5) v1(87,197.5) 99.75,197.5 v1(101.125,198.875) ; v1(101.125,180.125) v1@101.25,180 ; v1(112,212.5) D3.1 D3.32 v1(147.25,212.5)
  Bottom Layer w1: v1@78.501,177 v1(78.501,184.751) v1(78.501,194.251) 78.501,195.5 v1(80.5,197.5) v1(80.5,200.75) ; v1(86.5,174) v1(86.5,177.25) ; v1(87,197.5) v1(87,200.75) ; v1(92.925,174.175) 93.405,175.176 v1(93.405,177.155) ; v1(93.999,197.5) v1@93.999,200 ; v1(98.75,174) v1(98.75,177.25) ; v1(101.125,180.125) v1(101.125,189.125) v1(101.125,198.875) ; v1(111.5,198.875) 111.875,198.875 112,199 v1(112,212.5) ; v1(136.5,223.25) 136.5,214.75 137.74,213.51 D3.32 ; R1.1 147.25,197.68 145.8,199.13 145.8,201.181 146.649,202.03 147.03,202.03 147.25,202.25 R7.1 v1(147.25,212.5)
  other v1: 94,200.25
pads on no net: D1.3 D1.4 D1.5 D1.6 D1.8 D1.9 D1.10 D1.11 D1.12 D1.13 D2.5 D2.6 D2.8 D2.9 D2.10 D2.11 D2.12 D2.13 D3.30 D4.8 D4.9 D4.10 D4.11 D4.12 D4.13 D5.1 D5.2 D5.4 D5.5 D5.6 D5.7 D5.9 D5.11 D5.13 D5.14 D5.20 D5.21 D5.22 D5.24 D5.26 D5.27 D5.31 D5.33 D5.34 D5.36 D5.38 D5.39 D5.44 D5.48 D5.49 D5.50 D5.51 D5.52 D5.54 D5.58 D5.59 D5.60 D5.61 D5.62 D5.63 D5.67 D5.68 D5.70 D5.71 D5.72 D5.73 D5.76 D5.82 D5.83 D5.85 D5.88 D5.91 D5.97 D5.99 D5.102 D5.104 D5.105 D5.106 D5.107 D5.108 D5.109 D5.110 D5.112 D5.113 D5.114 D5.115 D5.116 D5.119 D5.120 D5.122 D5.125 D5.127 D5.128 D5.129 D5.130 D5.131 D5.134 D5.136 D5.140 D5.142 D5.145 D5.147 D5.150 D5.151 D5.152 D5.153 D5.154 D5.156 D5.157 D5.158 D5.159 D5.160

## Silkscreen, mask and mechanical layers (free items; w line width, h text height)
Top Overlay:
  lines w0.2: 191,162.5 191,227.5 192.5,227.5 ; 194,227.5 200,227.5 200,162.5
  lines w0.254: 191,162.5 192.5,162.5 ; 194,162.5 200,162.5
  lines w0.4: 192.5,162.5 194,162.5 194,227.5 192.5,227.5 192.5,162.5
  text "КП.5159.001 СБ" at 87.5,287.5 h7 r180
  text "1. * Размеры для справок." at 32.5,90 h3
  text "2. Установку ЭРЭ производить по ОСТ4 010.030-81." at 32.5,85 h3
  text "3. Паять ПОС 61 ГОСТ 21931-76." at 32.5,80 h3
  text "4. Технические требования к монтажу ЭРЭ по ГОСТ 23592-79." at 32.5,75 h3
  text "5. Остальные ТТ по ОСТ4 ГО.070.015." at 32.5,70 h3
  text "КП.5159.001 СБ" at 108,50 h7
  text "Блок цифровой" at 97.5,32.5 h7
  text "Сборочный чертеж" at 100,22.5 h5
  text "1" at 193,21.5 h3.5
Mechanical 1:
  the board outline again, w1.2
Mechanical 2:
  lines w0.254: 125,15 190,15
  lines w0.76: 5,13 15,13 ; 5.25,20 190,20 ; 15,5.25 15,20 ; 120,292 120,278 190,278 ; 125,5 125,20 ; 125,10 190,10 ; 135,5 135,20 ; 150,5 150,20 ; 173,5 173,20 ; 183,5 183,20 ; 190,5 190,292 5,292 5,5 201.999,5
  lines w0.762: 189.999,149.949 201.999,149.949 201.999,5.012 ; 190.001,30 202,30 ; 190.001,64.985 202,64.985 ; 190.001,89.974 202,89.974 ; 190.001,114.963 202,114.963 ; 197,5.011 197,149.948
  text "КП.5159.002" at 122,287.75 h7 r180
  text "A:" at 102.5,236 h4
  text "Подп. дата" at 198.501,124 h3.5 r270
  text "Инв. № дубл." at 198.5,92.959 h3.5 r270
  text "Взам. инв. №" at 198.501,68 h3.5 r270
  text "Подп. и дата" at 198.5,33.5 h3.5 r270
  text "Лист" at 14,15.5 h3.5
  text "2" at 10.5,8 h3.5
  text "Инв. № подл." at 198.5,8 h3.5 r270
  text "Дата" at 134.5,6 h3.5
  text "Подп." at 149.25,6 h3.5
  text "№ докум." at 172,6 h3.5
  text "Лист" at 182.25,6 h3.5
  text "Изм." at 189.5,6 h3.5
  text "Формат А4" at 51,1.5 h3.5
  text "Копировал" at 120,1.5 h3.5
Mechanical 4:
  lines w0.2: 180.25,196.75 181.75,197.25 180.25,197.75
  lines w0.254: 56.81,126.3 151.81,126.3 ; 86.81,111 86.81,132.55 ; 111.81,111 111.81,132.55 ; 56.81,111 151.81,111 151.81,132.55 56.81,132.55 56.81,111
  lines w0.4: 175.5,197.25 181.75,197.25 ; 185,162.5 185,227.5 186.5,227.5 186.5,162.5 185,162.5
  text "КП.5159.002" at 85,287.5 h7 r180
  text "A" at 176.75,198.5 h4
  text "Количество" at 59.291,128 h4.78
  text "Диаметр" at 90.5,128 h4.78
  text "Металлизация" at 117,128 h4.78
  text "112" at 67.75,122.5 h4.78
  text "0.8mm" at 93.5,122.5 h4.78
  text "есть" at 127.75,122.5 h4.78
  text "14" at 68.75,118 h4.78
  text "0.85mm" at 92.25,118 h4.78
  text "есть" at 127.75,118 h4.78
  text "9" at 70.25,113.25 h4.78
  text "0.9mm" at 93.5,113.25 h4.78
  text "есть" at 127.75,113.25 h4.78
  text "1. * Размер для справок." at 32.5,92.5 h3
  text "2. Плату изготовить комбинированным методом." at 32.5,87.5 h3
  text "3. Класс точности 3 по ГОСТ 23751-86." at 32.5,82.5 h3
  text "4. Данные отверстий приведены в таблице." at 32.5,77.5 h3
  text "5. Плата должна соответствовать ГОСТ 23752-79, группа жесткости 2." at 32.5,72.5 h3
  text "6. Остальные технические требования по ОСТ4 ГО.070.014." at 32.5,67.5 h3
  text "КП.5159.002" at 110.5,50 h7
  text "Плата печатная" at 99,33 h5
  text "1" at 168,21.5 h3.5
  text "2" at 193,21.5 h3.5
  text "Стеклотекстолит СФ-2-35Г-1,5" at 92.5,12.5 h4
  text "ГОСТ 10316-78" at 107.5,7.5 h4
Mechanical 16:
  lines w0.254: 19.974,9.996 84.972,9.996 ; 19.974,14.994 84.972,14.994 ; 19.974,19.992 84.972,19.992 ; 19.974,24.989 84.972,24.989 ; 19.974,29.987 84.972,29.987 ; 19.974,44.98 84.972,44.98 ; 19.974,49.977 84.972,49.977 ; 19.974,54.975 84.972,54.975 ; 159.989,24.989 159.989,39.982 ; 165.068,24.989 165.068,39.982
  lines w0.76: 20,5 205,5 205,292 20,292 20,5
  lines w0.762: 7.999,29.988 19.999,29.988 ; 7.999,64.973 19.999,64.973 ; 7.999,89.962 19.999,89.962 ; 7.999,114.951 19.999,114.951 ; 8,232.028 20,232.028 ; 12.999,4.999 12.999,149.935 ; 13,172.057 13,292 ; 19.974,34.985 84.972,34.985 ; 19.974,39.982 84.972,39.982 ; 19.974,59.973 204.967,59.973 ; 19.999,277.98 89.996,278.036 ; 20,172.057 8,172.057 8,292 20,292 ; 26.975,34.986 26.975,59.974 ; 36.974,4.999 36.974,59.973 ; 59.973,4.999 59.973,59.973 ; 74.972,4.999 74.972,59.973 ; 84.972,4.999 84.972,59.973 ; 84.972,19.992 204.967,19.992 ; 84.972,44.98 204.967,44.98 ; 89.996,277.98 89.996,291.974 ; 154.969,4.999 154.969,44.98 ; 154.969,24.989 204.967,24.989 ; 154.969,39.982 204.967,39.982 ; 169.968,24.989 169.968,44.98 ; 174.968,19.992 174.968,24.989 ; 186.967,24.989 186.967,44.98 ; 8.001,5 20,5 20,149.937 8.001,149.937 8.001,5
  text "Перв. примен." at 11.501,252.136 h3.5 r90
  text "Справ. №" at 11.501,194.136 h3.5 r90
  text "Инв. № подл." at 11.499,121 h3.5 r90
  text "Инв. № дубл." at 11.5,92.959 h3.5 r90
  text "Взам. инв. №" at 11.499,68 h3.5 r90
  text "Лит." at 157.969,41.5 h3.5
  text "Масса" at 172.968,41.5 h3.5
  text "Масштаб" at 188.867,41.5 h3.5
  text "Подп. и дата" at 11.5,36 h3.5 r90
  text "Изм." at 20.55,36 h3.5
  text "№ докум." at 39,36 h3.5
  text "Подп." at 64,36 h3.5
  text "Дата" at 75.7,36 h3.5
  text "Лист" at 27.55,35.9 h3.5
  text "Разраб." at 21.5,31.5 h3.5
  text "Ягодаров" at 39.75,31.5 h3.5
  text "1:1" at 192.5,30 h7
  text "Пров." at 21.473,26.5 h3.5
  text "Романова" at 39.75,26.25 h3.5
  text "Т. контр." at 21.5,21.492 h3.5
  text "Лист" at 158,21.5 h3.5
  text "Листов" at 178,21.492 h3.5
  text "Н. контр." at 21.473,11.5 h3.5
  text "СПбГУ ИТМО" at 163,11 h5
  text "Инв. № подл." at 11.5,8 h3.5 r90
  text "Утв." at 21.5,6.5 h3.5
  text "Гатчин" at 40.25,6.5 h3.5
  text "Копировал" at 93,1.5 h3.5
  text "Формат А4" at 162,1.5 h3.5

## Text inside footprints (layer, text, board x,y; h text height)
D5: Mechanical 13 "КП.5159.002" at 94.25,10 h7